# Altium PCB LINDIY.PcbDoc
Units mil, origin at the board's own origin, x right, y up, seen from the top; angles counter-clockwise.
Board outline 1574.8 x 2559.06 mil, 2 copper layers (Top Layer, Bottom Layer); 73 components, 55 nets, 246 pads, 140 vias.
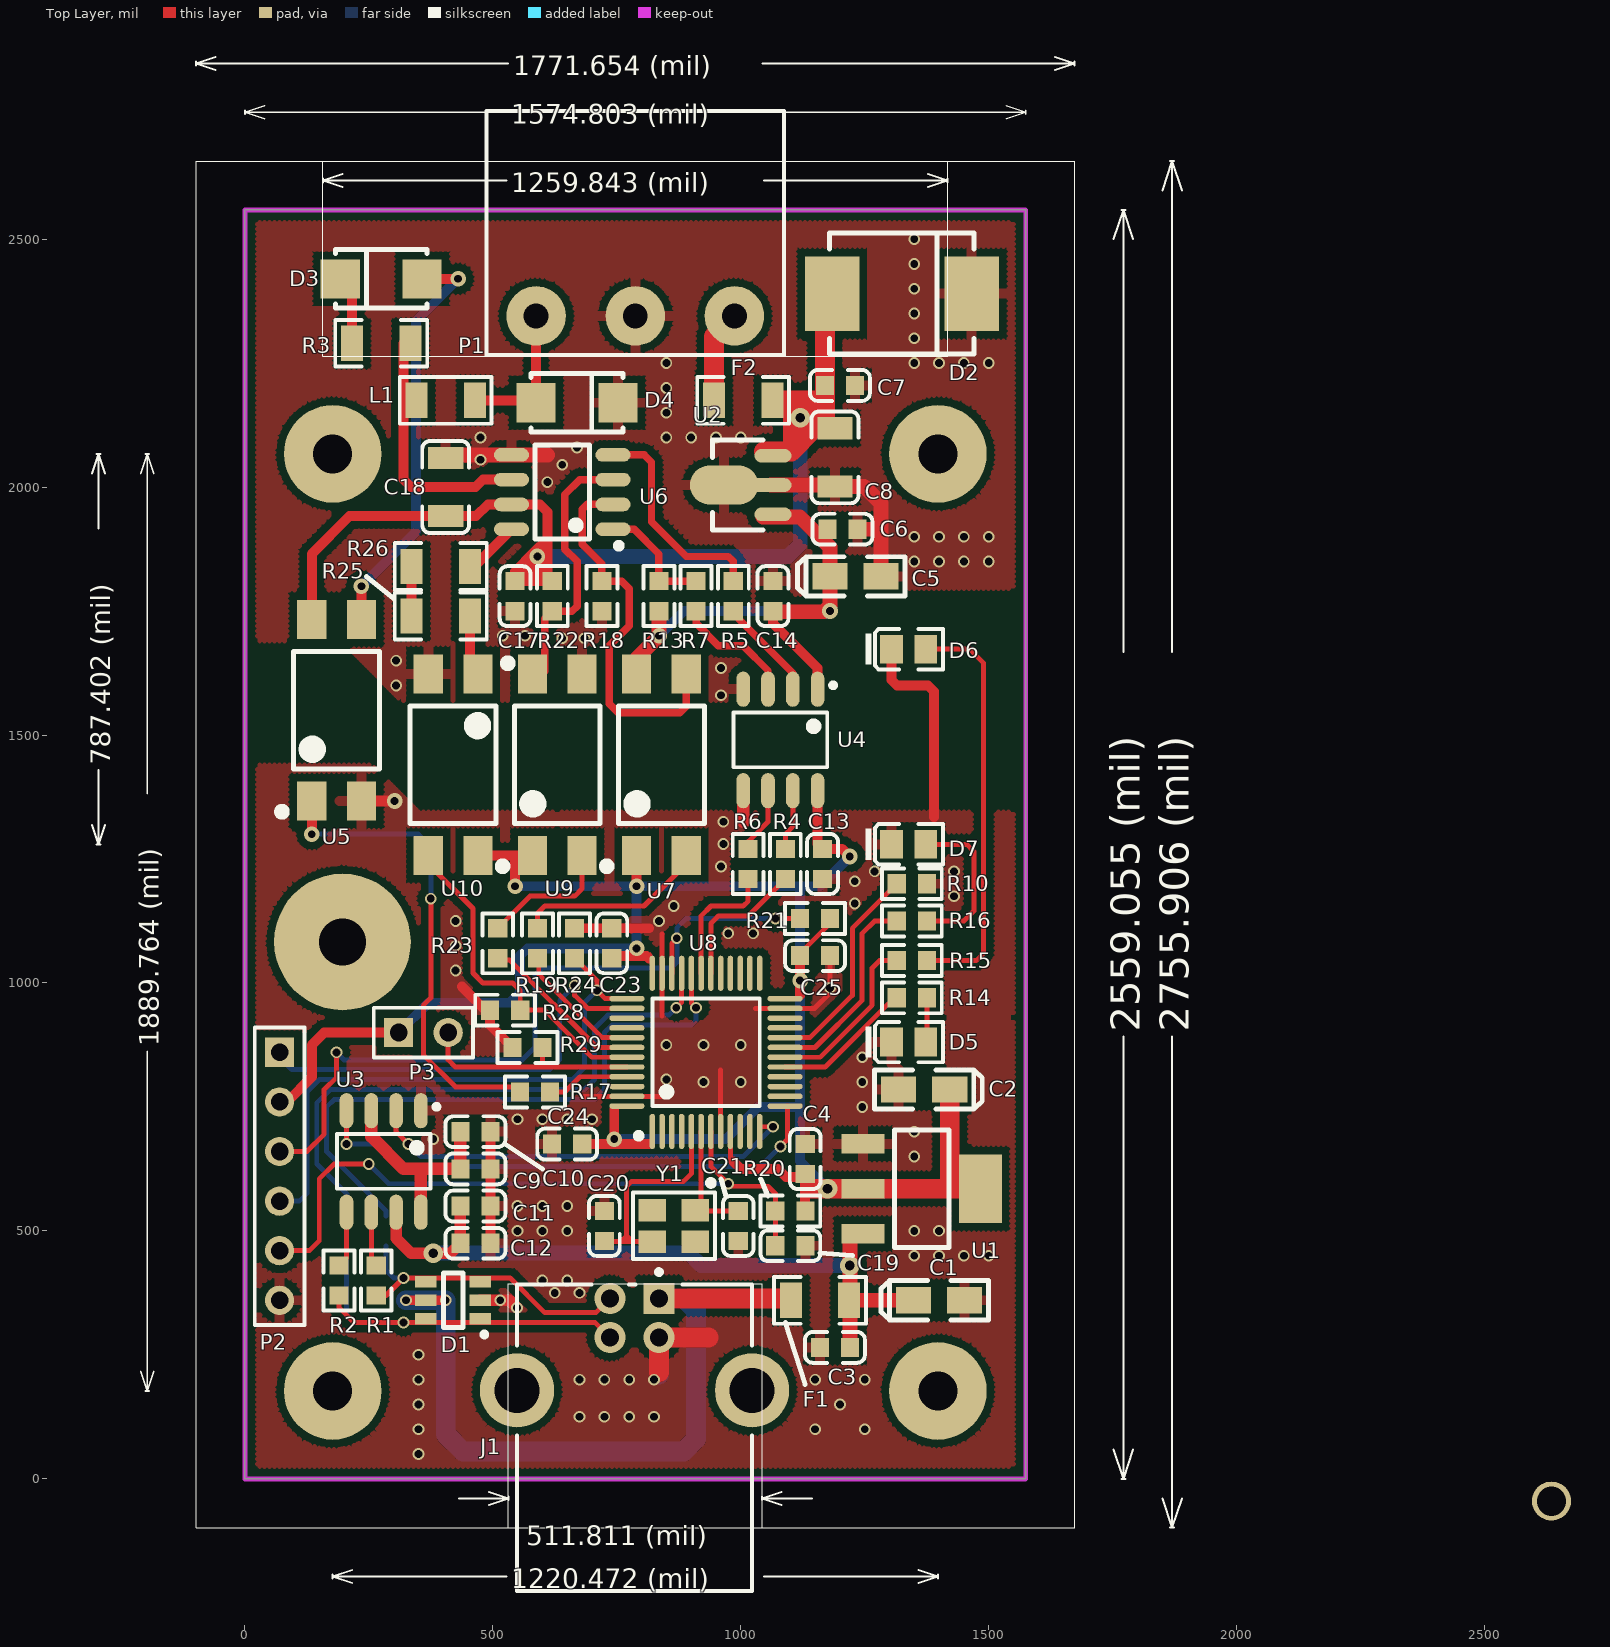
[diagram p0: Top Layer view]
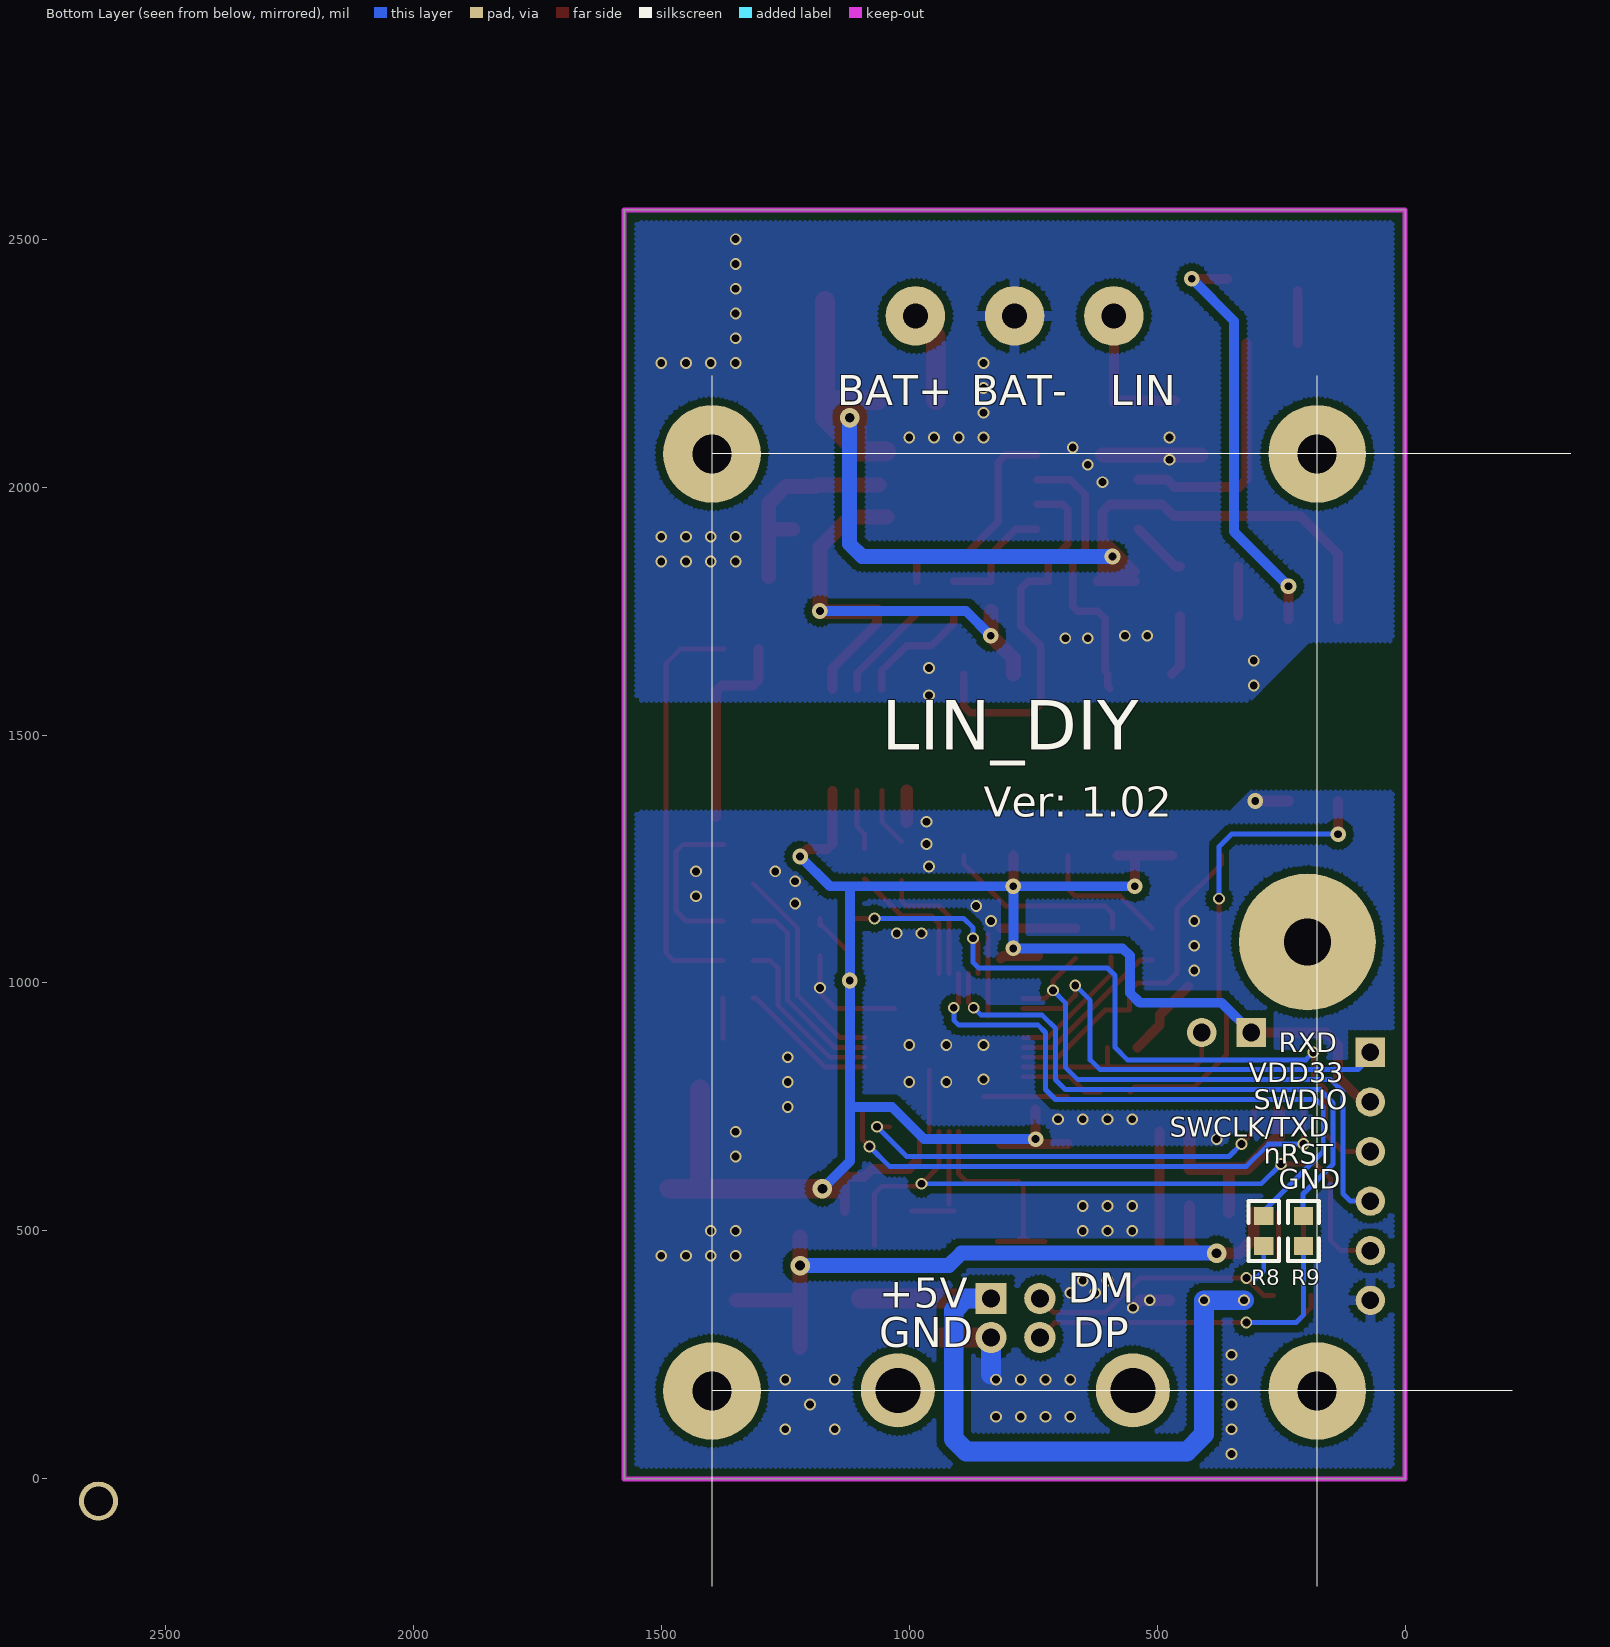
[diagram p1: Bottom Layer view, seen from below]
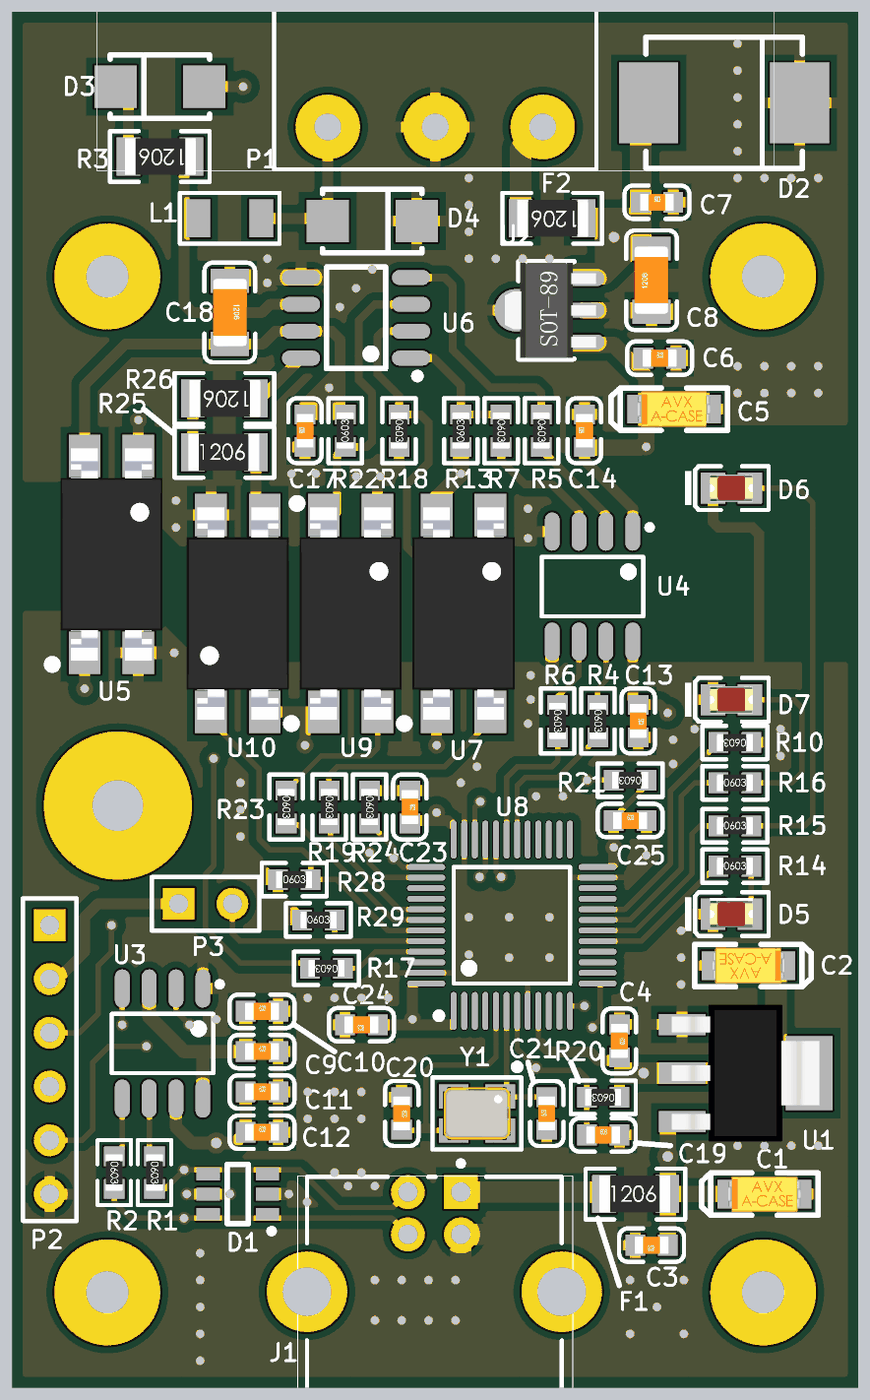
[diagram p2: 3D render of the assembled board from above, using the file's embedded part models]

## Layer stack, top to bottom
Top Layer: signal copper 1.4
Dielectric: dielectric 12.6, FR-4, Dk 4.8
Bottom Layer: signal copper 1.4

## Board outline
0,0 1574.8,0 1574.8,2559.06 0,2559.06

## Design rules (kind name [scope] priority, off if disabled: settings)
Clearance polygon [(InPolygon)] p1: gap=15
Clearance Clearance_1 [All] p2: gap=7.5
ComponentClearance [All] p1: gap=0 collisioncheckmode=3 verticalgap=0 showdistances=FALSE
Height [All] p1: minheight=0 maxheight=10000 prefheight=500
HoleToHoleClearance [All] p1: gap=0 allowstackedmicrovias=TRUE
MinimumSolderMaskSliver [All] p1: minsoldermaskwidth=0
PolygonConnect allPad [(InPadClass('All Pads'))] p1: connectstyle=Relief reliefconductorwidth=20 reliefentries=4 polygonreliefangle="90 Angle"
PolygonConnect [All] p2: connectstyle=Direct reliefconductorwidth=20 reliefentries=4 polygonreliefangle="90 Angle"
RoutingVias [All] p1: holewidth=28 width=50 viastyle="Through Hole" minholewidth=28 minwidth=50 maxholewidth=28 maxwidth=50
SilkToSilkClearance [All] p1: silktosilkclearance=0
SilkscreenOverComponentPads [All] p1: minsilkscreentomaskgap=0
SolderMaskExpansion [All] p1: expansion=4
TestPointUsage [All] p1: valid=0 allowmultiple=FALSE
Testpoint [All] p1: side=15 testpointundercomponent=TRUE minsize=40 maxsize=100 preferedsize=60 minholesize=0 maxholesize=40 preferedholesize=32 testpointgrid=1 style=1023 order=0-112345678
Width [All] p1: maxlimit=200 minlimit=10 preferedwidth=10
18 further rules are at their usual default settings.

## Components (designator, comment, footprint, x,y, rotation, side; value= is the part's Value field where it differs from the comment)
C1 "10uF/16V" LC-CASE-A_3216 1400,360 r180 top
C2 "10uF/16V" LC-CASE-A_3216 1370,785 r0 top
C3 "100nF/50V" LC-0603_C 1190,265 r180 top
C4 "100nF/50V" LC-0603_C 1130,645 r90 top
C5 "10uF/16V" LC-CASE-A_3216 1231.57,1820 r180 top
C6 "100nF/50V" LC-0603_C 1205,1915 r0 top
C7 "100nF/50V" LC-0603_C 1200,2205 r0 top
C8 "10uF/50V" LC-1206_C 1190,2060 r270 top
C9 "4.7uF/16V" LC-0603_C 465,625 r0 top
C10 "100nF/50V" LC-0603_C 465,700 r0 top
C11 "4.7uF/16V" LC-0603_C 465,550 r0 top
C12 "100nF/50V" LC-0603_C 465,475 r0 top
C13 "100nF/50V" LC-0603_C 1165,1240 r90 top
C14 "100nF/50V" LC-0603_C 1065,1780 r270 top
C17 "100nF/50V" LC-0603_C 545,1780 r270 top
C18 "10uF/50V" LC-1206_C 405,2000 r90 top
C19 "100nF" LC-0603_C 1100,470 r0 top
C20 "22pF" LC-0603_C 725,510 r90 top
C21 "22pF" LC-0603_C 995,510 r270 top
C23 "100nF" LC-0603_C 740,1080 r90 top
C24 "100nF" LC-0603_C 650,675 r180 top
C25 "100nF" LC-0603_C 1150,1055 r0 top
D1 "SRV05-4" LC-SOT-23-6 419.88,360 r0 top
D2 "SMCJ28CA" LC-SMC(DO-214AB)_S1 1325,2390 r180 top
D3 "1N4007" LC-SMA(DO-214AC)_S1 275,2420 r0 top
D4 "SMAJ28CA" LC-SMA(DO-214AC)_S1 670,2170 r180 top
D5 "LED_RED" LC-0805_LED_S1 1338.58,880.83 r0 top
D6 "LED_GREEG" LC-0805_LED_S1 1338.58,1673.23 r0 top
D7 "LED_RED" LC-0805_LED_S1 1338.58,1279.53 r0 top
F1 "0.5A/8V" LC-1206_R 1160,360 r0 top
F2 "0.1A/60V" LC-1206_R 1005,2175 r180 top
J1 "USB-B" USB/B 835,363.74 r0 top locked
L1 "600R@100MHz" LC-1206_L 405,2175 r180 top
P1 "LIN PORT" 5.08-3 987.4,2345 r180 top
P2 "SWIO" HDR1X6 70,860 r270 top
P3 "JMP" HDR1X2 310,900 r0 top
R1 "22R" LC-0603_R 265,400 r90 top
R2 "22R" LC-0603_R 190,400 r90 top
R3 "1K" LC-1206_R 275,2290 r180 top
R4 "220R" LC-0603_R 1090,1240 r90 top
R5 "220R" LC-0603_R 985,1780 r90 top
R6 "220R" LC-0603_R 1015,1240 r90 top
R7 "220R" LC-0603_R 910,1780 r90 top
R8 "NC" LC-0603_R 285,500 r90 bottom
R9 "NC" LC-0603_R 205,500 r90 bottom
R10 "10K" LC-0603_R 1345,1200 r180 top
R13 "4K7" LC-0603_R 835,1780 r270 top
R14 "330R" LC-0603_R 1345,970 r0 top
R15 "330R" LC-0603_R 1345,1045 r0 top
R16 "330R" LC-0603_R 1345,1125 r0 top
R17 "330R" LC-0603_R 585,780 r180 top
R18 "2K" LC-0603_R 720,1780 r90 top
R19 "330R" LC-0603_R 590,1080 r90 top
R20 "10K" LC-0603_R 1100,540 r180 top
R21 "10K" LC-0603_R 1150,1130 r180 top
R22 "10K" LC-0603_R 620,1780 r270 top
R23 "330R" LC-0603_R 510,1080 r90 top
R24 "10K" LC-0603_R 665,1080 r90 top
R25 "1K" LC-1206_R 395,1740 r0 top
R26 "1K" LC-1206_R 395,1840 r180 top
R28 "1K" LC-0603_R 525,945 r0 top
R29 "10K" LC-0603_R 570,870 r0 top
U1 "AMS1117-3.3" LC-SOT-223 1365,585 r180 top
U2 "78L05" LC-SOT-89(SOT-89-3) 1065,2004.06 r0 top
U3 "PL2303SA" LC-SO-8_3.9mm 280,640 r180 top
U4 "ADUM1201" LC-SO-8_3.9mm 1080,1490 r180 top
U5 "EL817S1" LC-SMD-4 185,1550 r90 top
U6 "TJA1020T" LC-SOIC-8_150mil 640,1990 r90 top
U7 "EL817S1" LC-SMD-4 840,1440 r90 top
U8 "STM32F072C8T6" LC-LQFP-48_7x7x05P 930,860 r0 top locked
U9 "EL817S1" LC-SMD-4 630,1440 r90 top
U10 "EL817S1" LC-SMD-4 420,1440 r270 top
Y1 "8MHz" LC-SMD-3225_4P 865,510 r180 top

## Footprints (in the part's own frame and the unit in brackets; to place one, negate y for a bottom-side part, rotate by r counter-clockwise, add the part's x,y. Pads: shape width x height; smd on the part's side, far side on the other; paste and mask are expansions set on the pad)
5.08-3 [mil]
  round 120 hole 50: 1(0,0) 2(200,0) 3(400,0)
  silkscreen extent -100,-413 500,79
HDR1X2 [mm] "Connector; Header; 2 Position"
  rect 1.5x1.5 hole 0.9: 1(0,0)
  round 1.5 hole 0.9: 2(2.54,0)
  silkscreen extent -1.27,-1.27 3.81,1.27
HDR1X6 [mm] "Connector; Header; 6 Position"
  rect 1.5x1.5 hole 0.9: 1(0,0)
  round 1.5 hole 0.9: 2(2.54,0) 3(5.08,0) 4(7.62,0) 5(10.16,0) 6(12.7,0)
  silkscreen extent -1.27,-1.27 13.97,1.27
LC-0603_C [mm]
  rect 0.93x0.98 smd: 1(-0.77,0) 2(0.77,0)
  silkscreen extent -1.53,-0.79 1.54,0.79, body extent -0.8,-0.4 0.8,0.4, height 0.3
LC-0603_R [mm]
  rect 0.93x0.98 smd: 1(-0.77,0) 2(0.77,0)
  silkscreen extent -1.53,-0.79 1.54,0.79, body extent -0.85,-0.4 0.85,0.4, height 0.56
LC-0805_LED_S1 [mm]
  rect 1.16x1.47 smd: A(0.875,0) K(-0.875,0)
  silkscreen extent -2.2,-1.04 1.76,1.03, body extent -1.01,-0.62 1.01,0.62, height 1.1
LC-1206_C [mm]
  rect 1.13x1.8 smd: 1(-1.49,0) 2(1.49,0)
  silkscreen extent -2.36,-1.2 2.35,1.2, body extent -1.6,-0.81 1.6,0.79, height 1
LC-1206_L [mm]
  rect 1.13x1.8 smd: 1(-1.49,0) 2(1.49,0)
  silkscreen extent -2.36,-1.2 2.35,1.2
LC-1206_R [mm]
  rect 1.13x1.8 smd: 1(-1.49,0) 2(1.49,0)
  silkscreen extent -2.36,-1.2 2.35,1.2, body extent -1.7,-0.86 1.65,0.87, height 0.85
LC-CASE-A_3216 [mm]
  rect 1.8x1.35 smd: 1(1.31,0) 2(-1.31,0)
  silkscreen extent -2.54,-1 2.97,1, body extent -1.7,-0.84 1.7,0.84, height 1.71
LC-LQFP-48_7x7x05P [mm]
  oval 0.28x1.8 smd mask+0.051: 1(-2.75,-4.05) 2(-2.25,-4.05) 3(-1.75,-4.05) 4(-1.25,-4.05) 5(-0.75,-4.05) 6(-0.25,-4.05) 7(0.25,-4.05) 8(0.75,-4.05) 9(1.25,-4.05) 10(1.75,-4.05) 11(2.25,-4.05) 12(2.75,-4.05) 25(2.75,4.05) 26(2.25,4.05) 27(1.75,4.05) 28(1.25,4.05) 29(0.75,4.05) 30(0.25,4.05) 31(-0.25,4.05) 32(-0.75,4.05) 33(-1.25,4.05) 34(-1.75,4.05) 35(-2.25,4.05) 36(-2.75,4.05)
  oval 1.8x0.28 smd mask+0.051: 13(4.05,-2.75) 14(4.05,-2.25) 15(4.05,-1.75) 16(4.05,-1.25) 17(4.05,-0.75) 18(4.05,-0.25) 19(4.05,0.25) 20(4.05,0.75) 21(4.05,1.25) 22(4.05,1.75) 23(4.05,2.25) 24(4.05,2.75) 37(-4.05,2.75) 38(-4.05,2.25) 39(-4.05,1.75) 40(-4.05,1.25) 41(-4.05,0.75) 42(-4.05,0.25) 43(-4.05,-0.25) 44(-4.05,-0.75) 45(-4.05,-1.25) 46(-4.05,-1.75) 47(-4.05,-2.25) 48(-4.05,-2.75)
  silkscreen extent -3.6,-4.42 2.75,2.75
LC-SMA(DO-214AC)_S1 [mm]
  rect 2x2 smd: 1(2.1,0) 2(-2.1,0)
  silkscreen extent -2.35,-1.5 2.35,1.5
LC-SMC(DO-214AB)_S1 [mil]
  rect 110x150 smd: 1(140.49,0) 2(-140.49,0)
  silkscreen extent -146,-122 146,122
LC-SMD-4 [mm]
  rect 2x1.5 smd: 1(-4.65,1.27) 2(-4.65,-1.27) 3(4.65,-1.27) 4(4.65,1.27)
  silkscreen extent -5.4,-2.2 3,3, body extent -5.02,-2.42 5.01,2.42, height 3.9
LC-SMD-3225_4P [mm]
  rect 1.4x1.15 smd: 1(-1.1,-0.8) 2(1.1,-0.8) 3(1.1,0.8) 4(-1.1,0.8)
  silkscreen extent -2.1,-2.35 2.1,1.7, body extent -1.6,-1.25 1.6,1.25, height 0.61
LC-SO-8_3.9mm [mm]
  oval 0.7x1.8 smd: 1(-1.905,-2.6) 2(-0.635,-2.6) 3(0.635,-2.6) 4(1.905,-2.6) 5(1.905,2.6) 6(0.635,2.6) 7(-0.635,2.6) 8(-1.905,2.6)
  silkscreen extent -2.83,-2.92 2.4,1.4
LC-SOIC-8_150mil [mm]
  oval 0.7x1.8 smd: 1(-1.905,-2.6) 2(-0.635,-2.6) 3(0.635,-2.6) 4(1.905,-2.6) 5(1.905,2.6) 6(0.635,2.6) 7(-0.635,2.6) 8(-1.905,2.6)
  silkscreen extent -2.9,-3.05 2.4,1.4
LC-SOT-23-6 [mm]
  rect 1.1x0.6 smd: 1(1.4,-0.95) 2(1.4,0) 3(1.4,0.95) 4(-1.4,0.95) 5(-1.4,0) 6(-1.4,-0.95)
  silkscreen extent -0.5,-1.87 1.73,1.4
LC-SOT-89(SOT-89-3) [mm]
  oval 1.9x0.7 smd: 1(0,-1.5) 3(0,1.5)
  oval 3.5x2 smd: 2(-2.5,0)
  oval 2.1x0.7 smd: 2(-0.1,0)
  silkscreen extent -3.1,-2.3 -0.5,2.3, body extent -3.75,-2.25 0.55,2.25, height 1.51
LC-SOT-223 [mm]
  rect 2.2x1 smd: 1(3,-2.3) 2(3,0) 3(3,2.3)
  rect 2.2x3.5 smd: 2(-3,0)
  silkscreen extent -1.4,-3 1.4,3, body extent -3.49,-3.24 3.49,3.24, height 1.64
USB/B [mm]
  rect 1.6x1.6 hole 0.92: 1(0,0)
  round 1.6 hole 0.92: 2(-2.5,0) 3(-2.5,-2) 4(0,-2)
  round 3.8 hole 2.3: 5(4.77,-4.71) 6(-7.27,-4.71)
  silkscreen extent -7.27,-14.99 4.77,1.47

## Part data
C1 C2 C5: library part "Cap Pol2", "Polarized Capacitor (Axial)"
C3 C4 C6 C7 C8 C9 C10 C11 C12 C13 C14 C17 C18 C19 C20 C21 C23 C24 C25: library part Cap, "Capacitor"
D1: "Low Capacitance TVS Diode Array"
D2 D4: library part P6KE6.8CA, "Zener Diode"
D3: library part "Diode BAS116", "Silicon Low Leakage Diode"
D5: library part LED-R
D6: library part LED-G
D7: library part LED-B
F1 F2: library part "Fuse Thermal", "Thermal Fuse"
J1: library part MINI-USB
L1: library part FerriteBeads
P1: library part "Header 3", "Header, 3-Pin"
P2: library part "Header 6", "Header, 6-Pin"
P3: library part "Header 2", "Header, 2-Pin"
R1 R2 R3 R4 R5 R6 R7 R8 R9 R10 R13 R14 R15 R16 R17 R18 R19 R20 R21 R22 R23 R24 R25 R26 R28 R29: library part Res2, "Resistor"
U1: library part AMS1117
U2: library part MC7805ACT, "Three-Terminal Positive Voltage Regulator"
U3: "USB to Serial Bridge Controller (SOP8 Package)"
U4: "Dual-Channel Digital Isolators"
U5 U7 U9 U10: library part TLP521-1
U6: library part TJA1020, "LIN transceiver"
U8: library part STM32F103C8T6, "STM32 ARM-based 32-bit MCU with 64 Kbytes Flash, 48-pin LQFP, Industrial Temperature"
Y1: library part XTAL, "Crystal Oscillator"

## Free pads (board coordinates)
  round 196.85 hole 78.74: 0(177.17,177.17) 0(177.17,2066.93) 0(1397.64,177.17) 0(1397.64,2066.93)
  round 275.59 hole 94.49: 0(196.85,1082.68)
  round 78.74 hole 59.06: 0(2635,-45)
  rect 80x50 on Top Overlay: 1(1338.58,1279.53) 2(1338.58,1673.23) 3(1338.58,885.83)

## Via types
v1: diameter 23.62, hole 15.75, Top Layer to Bottom Layer, tented both sides, 123 vias
v2: diameter 31.5, hole 15.75, Top Layer to Bottom Layer, tented both sides, 13 vias
v3: diameter 39.37, hole 19.68, Top Layer to Bottom Layer, tented both sides, 4 vias

## Nets (pads, with @x,y where several pads share a name; then routed paths per layer and width w, separated by ;. In a path a pad name is that pad's centre, name@x,y a point inside that pad or via, vN(x,y) a via of type N, cw(c..) or ccw(c..) an arc to the next point about the centre after c; other vN are vias at no path point)
BOOT0: P3.2 R29.2 U8.44 | length 456.4
  Top Layer w10: P3.2 410,845 424.53,830.47 U8.44 ; 600.32,835.16 R29.2
BOOT1: R10.2 U8.20 | length 433.1
  Top Layer w10: U8.20 1139.53,889.53 1225,975 1225,1110.32 R10.2
DGND: C1.2 C2.2 C3.2 C4.2 C9.2 C10.2 C11.2 C12.2 C13.1 C19.2 C20.2 C21.2 C23.2 C24.2 C25.2 D1.2 D5.K D6.K D7.K J1.4 P2.6 R10.1 R24.2 R28.1 R29.1 U1.1 U3.1 U4.5 U5.2 U8.8 U8.23 U8.35 U8.47 | length 2100.9
  Top Layer w10: 681.42,771.42 U8.47 850,771.42 ; 841.42,933.58 U8.35 841.42,1098.58 ; U8.8 959.53,824.53 ; 1030,948.58 U8.23 1148.58,948.58 1180.32,980.32 C25.2
  Top Layer w20: 437.5,992.5 494.69,935.31 494.69,915 R29.1 ; C12.2 C10.2 ; R24.2 815.32,1110.32 ; D6.K 1304.13,1610.87 1315,1600 1377.64,1600 1390,1587.64 1390,1335
  Top Layer w23: U5.2 v2(301.93,1366.93) ; D1.2 v1(515,360) 533.78,360 v1(548.78,345)
  Top Layer w25: 1005,1325 U4.5
  Top Layer w40: 835,215 J1.4 935,285
  Bottom Layer w40: 835,210 J1.4
  other v1: 350,50 350,100 1150,100 1250,100 675,125 725,125 775,125 825,125 350,150 1200,150 350,200 675,200 725,200 775,200 825,200 1150,200 1250,200 350,250 625,375 675,375 600,400 650,400 1350,450 1400,450 1450,450 1500,450 550,500 600,500 650,500 1350,500 1400,500 550,550 600,550 650,550 1350,650 380,685 1350,700 550,725 600,725 650,725 700,725 1245,750 925,800 1000,800 1245,800 850,805.47 1245,850 850,875 925,875 1000,875 1180,990 425,1025 425,1075 975,1100 1025,1100 425,1125 835,1125 865,1155 1230,1160 1430,1175 1230,1205 1270,1225 1430,1225 960,1235 965,1280 965,1325
DM: D1.3 D1.4 J1.2 R1.1 R8.1 | length 618
  Top Layer w10: R1.1 284.69,369.69 v1(320,405) 364.76,405 475,405 535,405 605,335 707.83,335 J1.2
  Bottom Layer w10: R8.1 285,420 300,405 v1(320,405)
DP: D1.1 D1.6 J1.3 R2.1 R9.1 | length 857
  Top Layer w10: R2.1 190,345 220,315 v1(320,315) 364.76,315 475,315 706.57,315 J1.3
  Bottom Layer w10: R9.1 205,330 220,315 v1(320,315)
L5V: C5.1 C6.1 C14.2 R13.2 U2.1 U4.1 U7.4 | length 1102.7
  Top Layer w20: C14.2@1065,1748.5 1065,1725 1155,1635 U4.1
  Top Layer w30: U7.4 790,1654.6 v2(835.4,1700) ; v2@835,1700.4 R13.2 ; U2.1@1045,1940 1065,1940 1118.9,1940 1159.29,1899.61 1180,1878.9 C5.1 1180,1760 1175,1755 1168.5,1748.5 C14.2@1065,1748.5
  Bottom Layer w20: v2(835.4,1700) 885.4,1750 v2(1180,1750)
LED1: R14.1 U8.17 | length 283.1
  Top Layer w10: U8.17 1170.47,830.47 1309.84,969.84 1314.69,969.84 R14.1@1314.84,969.84
LED2: R15.1 U8.18 | length 349.9
  Top Layer w10: U8.18 1160.16,850.16 1265,955 1265,1030 1280,1045 R15.1
LED3: R16.1 U8.19 | length 410
  Top Layer w10: U8.19 1149.84,869.84 1245,965 1245,1100 1270,1125 R16.1
LGND: C5.2 C6.2 C7.2 C8.2 C14.1 C17.2 C18.2 D2.2 D4.2 P1.2 R18.1 U2.2 U4.4 U6.5 U9.3 U10.2 | length 622
  Top Layer w30: C18.2@411.34,2065 610,2065 ; U2.2@1061.06,2004.06 C8.2@1187.28,2004.06 ; C8.2 1248.66,2001.34 1283.15,1966.85 C5.2 ; C6.2 1278.15,1915
  other v1: 960,1580 305,1600 960,1635 305,1650 640,1695 685,1695 520,1700 565,1700 1350,1850 1400,1850 1450,1850 1500,1850 1350,1900 1400,1900 1450,1900 1500,1900 610,2010 640,2045 475,2055 670,2080 475,2100 850,2100 900,2100 950,2100 1000,2100 850,2150 850,2200 850,2250 1350,2250 1400,2250 1450,2250 1500,2250 1350,2300 1350,2350 1350,2400 1350,2450 1350,2500
LIN_INH: R26.1 U6.8 | length 115
  Top Layer w20: R26.1 462.64,1840 U6.8
LIN_NSLP: R18.2 U6.2 U7.3 | length 770.3
  Top Layer w15: U6.2 690,1965 680,1955 680,1885 720,1845 R18.2 759.68,1810.32 775,1795 775,1720 735,1680 735,1563.39 753.39,1545 876.89,1545 890,1558.11 U7.3
LIN_NWAKE: R22.2 U6.3 U9.4 | length 566.6
  Top Layer w15: U9.4@595,1593.07 600,1598.07 600,1623.07 605,1628.07 605,1735 619.68,1749.68 R22.2 659.68,1749.68 670,1760 670,1850 645,1875 645,1985 675,2015 U6.3
LIN_OUT: L1.2 R3.1 U6.6 | length 505.1
  Top Layer w20: R3.1@320,2290 320,2175 320,2015 335,2000 465,2000 480,2015 U6.6
LIN_PULLUP: D3.1 U5.3 | length 840
  Top Layer w20: U5.3 v2(235,1800) ; D3.1 v2(430,2420)
  Bottom Layer w20: v2(235,1800) 345,1910 345,2335 v2(430,2420)
LIN_RX: R7.2 R13.1 U6.1 | length 243
  Top Layer w15: U6.1 785,1915 835,1865 R13.1 R7.2
LIN_TX: R5.2 U6.4 | length 441.7
  Top Layer w15: U6.4 805,2065 820,2050 820,1930 890,1860 975,1860 985,1850 R5.2
MCU_3V3: C2.1 C4.1 C13.2 C23.1 C24.1 C25.1 P2.2 P3.1 R20.1 R21.1 U1.2 U4.8 U7.1 U8.1 U8.9 U8.24 U8.36 U8.48 U9.1 U10.4 | length 4474.7
  Top Layer w10: U8.9 979.21,645.79 985,640 ; C25.1@1119.68,1060 R21.1@1180.31,1120.63 ; R21.1@1180.31,1115.63 R21.1@1180.31,1120.63 ; R21.1 R21.1@1180.31,1120.63
  Top Layer w20: P2.2@85,760 135,810 135,875 160,900 P3.1 ; U10.4 545,1256.93 ; v2(545,1195) 545,1256.93 ; U9.1 545,1256.93 ; C24.1 v2@745,675 ; C23.1@740,1054.68 790,1054.68 810.32,1054.68 815.32,1049.68 ; 745,745 v2(745,685) v2@745,675 ; v2(790,1195) U7.1 ; 815,675 v2@745,675 ; 985,640 1000.32,624.68 1075.32,624.68 1091.49,608.51 C4.1@1130,608.51 ; 1119.68,975 v2(1119.68,1005) C25.1 ; R20.1@1130,540.31 C4.1 ; C13.2@1155,1280.32 U4.8 ; C13.2 1204.68,1270.32 v2(1220,1255)
  Top Layer w40: 1140,585 v3(1175,585) 1246.89,585 U1.2@1483.11,585 ; 1421.57,588.43 C2.1
  Bottom Layer w20: P3.1 370,960 535,960 555,980 555,1055 569.68,1069.68 v2(790,1069.68) v2(790,1195) ; v2(545,1195) v2(790,1195) ; v2(745,685) 970,685 1035,750 1119.68,750 ; v3(1175,585) 1119.68,640.32 1119.68,750 ; v2(1220,1255) 1160,1195 1119.68,1195 ; v2(790,1195) 1119.68,1195 ; 1119.68,750 v2(1119.68,1005) 1119.68,1195
MCU_INH: R28.2 U8.43 U10.3 | length 673.4
  Top Layer w10: U10.3 370,1240 460,1150 460,1020 480,1000 540,1000 555.32,984.68 R28.2 ; R28.2@560.32,945 605,945 699.84,850.16 U8.43
MCU_MST: R17.1 U8.45 | length 168
  Top Layer w10: R17.1 645,780 675.79,810.79 U8.45
MCU_NSLP: R19.1 U8.41 | length 265.8
  Top Layer w10: R19.1@592.66,1052.34 592.66,1049.69 592.66,1017.34 720.47,889.53 U8.41
MCU_NWAKE: R23.1 U8.42 | length 333.7
  Top Layer w10: R23.1@510,1046.54 533.46,1046.54 710.16,869.84 U8.42
NetD3_2: D3.2 R3.2 | length 106
  Top Layer w20: R3.2 D3.2@216.34,2395.98
NetD4_1: D4.1 L1.1 P1.3 | length 293.6
  Top Layer w20: L1.1 D4.1@582.32,2175 ; D4.1 P1.3@587.32,2344.92
NetD5_A: D5.A R14.2 | length 81.9
  Top Layer w10: D5.A@1375.32,888.11 R14.2
NetD6_A: D6.A R15.2 | length 834.6
  Top Layer w10: D6.A 1461.77,1673.23 1490,1645 1490,1060 1475,1045 R15.2
NetD7_A: D7.A R16.2 | length 326
  Top Layer w10: D7.A 1455.47,1279.53 1470,1265 1470,1145 1450,1125 R16.2
NetR4_2: R4.2 U4.7 | length 123.5
  Top Layer w10: R4.2 1090,1300 1105,1315 U4.7
NetR5_1: R5.1 U4.2 | length 207
  Top Layer w15: R5.1 985,1745 1105,1625 U4.2
NetR6_2: R6.2 U4.6 | length 119.2
  Top Layer w10: R6.2@1015,1285 1055,1325 U4.6
NetR7_1: R7.1 U4.3 | length 246.7
  Top Layer w15: R7.1 910,1725 955,1680 1005,1680 1055,1630 U4.3
NetR8_2: R8.2 U8.32 | length 1252.6
  Top Layer w10: U8.32 900.47,959.53 v1(910,950)
  Bottom Layer w10: R8.2 285,540 165,660 165,750 180,765 705,765 725,785 725,900 740,915 900,915 910,925 v1(910,950)
NetR9_2: R9.2 U8.33 | length 1198.5
  Top Layer w10: v1(870,950) 880.79,960.79 U8.33
  Bottom Layer w10: R9.2@210.86,525.86 205.7,531.02 205.7,574.3 145,635 145,758.28 171.72,785 685,785 705,805 705,908.28 731.72,935 855,935 v1(870,950)
NetR17_2: R17.2 U5.1 | length 969.2
  Top Layer w10: v1(375,1170) 375,970 360,955 360,855 425,790 544.68,790 R17.2
  Top Layer w20: v2(135,1300) U5.1
  Bottom Layer w10: v2(135,1300) 350,1300 375,1275 v1(375,1170)
NetR19_2: R19.2 U7.2 | length 388
  Top Layer w10: R19.2 590,1140 605,1155 805,1155 890,1240 U7.2
NetR23_2: R23.2 U9.2 | length 269.6
  Top Layer w10: R23.2@510.32,1110.32 575,1175 665,1175 680,1190 U9.2
NetR25_1: R25.1 R26.2 | length 100
  Top Layer w20: R25.1 R26.2
NetR25_2: R25.2 U10.1 | length 123.7
  Top Layer w20: R25.2 453.66,1639.41 U10.1
NRST: C19.1 P2.5 R20.2 U8.7 | length 1395.5
  Top Layer w10: P2.5 130,460 150,480 150,605 180,635 v1(250,635) ; U8.7 939.84,630.16 v1(975,595) 980,590 1055,590 1069.68,575.32 R20.2 C19.1
  Bottom Layer w10: v1(250,635) 290,595 v1(975,595)
OSC8M_IN: C20.1 U8.5 Y1.3 | length 470.6
  Top Layer w10: C20.1@726.18,478.5 758.5,478.5 ; 776.5,478.5 781.5,478.5 ; Y1.3 781.5,478.5 ; U8.5 900.47,615.47 885,600 780,600 770,590 770,490 ; 758.5,478.5 770,478.5 ; 758.5,478.5 770,490 ; 770,478.5 770,490 ; 770,478.5 781.5,478.5 ; 770,490 781.5,478.5
OSC8M_OUT: C21.1 U8.6 Y1.1 | length 232.7
  Top Layer w10: Y1.1@909.49,540.32 C21.1 ; Y1.1@920.16,553.35 U8.6
PA15: P2.1 U8.38 | length 882.6
  Top Layer w10: v1(665,995) 665,975 691.42,948.58 U8.38
  Bottom Layer w10: P2.1@70,850 95,825 615,825 635,845 635,965 v1(665,995)
SWCLK: P2.4 R24.1 U8.37 | length 1163.1
  Top Layer w10: R24.1 710,1004.69 v1(710,985) 726.73,968.27 U8.37
  Bottom Layer w10: P2.4 110,560 125,575 125,780 150,805 660,805 685,830 685,960 v1(710,985)
SWDIO: P2.3 R21.2 U8.34 | length 1539.4
  Top Layer w10: P2.3 125,660 160,695 160,785 185,810 v1(185,860) ; U8.34 861.1,1080 v1(871.1,1090) ; v1(1070,1130) R21.2
  Bottom Layer w10: v1(185,860) 200,845 560,845 585,870 585,1015 600,1030 860,1030 871.1,1041.1 v1(871.1,1090) 871.1,1111.1 890,1130 v1(1070,1130)
USART1_RXD: R6.1 U8.31 | length 264.5
  Top Layer w10: U8.31 920.16,1135.16 940,1155 1005,1155 1015,1165 R6.1@1015,1206.54
USART1_TXD: R4.1 U8.30 | length 287.8
  Top Layer w10: U8.30 939.84,1119.84 955,1135 1015.31,1135 R4.1
USART2_RXD: U3.4 U8.13 | length 1065.3
  Top Layer w10: v1(205,675) U3.4 ; v1(1080,670) 1094.45,684.45 U8.13@1094.45,751.73
  Bottom Layer w10: v1(205,675) 275,675 320,630 1040,630 v1(1080,670)
USART2_TXD: U3.2 U8.12 | length 872.9
  Top Layer w10: U3.2 305,700 v1(330,675) ; U8.12@1040,710 v1(1065,710)
  Bottom Layer w10: v1(330,675) 355,650 1005,650 v1(1065,710)
USB_3V3: C9.1 C10.1 U3.3 U3.8 | length 421.3
  Top Layer w25: U3.3 255,690 320,625 355,625 ; U3.8 355,625 ; C10.1 C9.1 355,625
USB_5V: C1.1 C3.1 C11.1 C12.1 F1.2 U1.3 U3.7 | length 1479.4
  Top Layer w23: U3.7 305,485 335,455 v3(380,455) 414.68,455 C12.1 C11.1
  Top Layer w30: C3.1 F1.2@1220.32,360 ; U1.3@1220.32,487.87 1220.32,430 F1.2@1220.32,360 ; C1.1 F1.2@1220.32,360
  Bottom Layer w30: v3(380,455) 895,455 920,430 v3(1220,430)
USB_DM: R1.2 U3.6 | length 97.3
  Top Layer w10: R1.2@255,440.32 U3.6
USB_DP: R2.2 U3.5 | length 92.3
  Top Layer w10: R2.2@205,445.32 U3.5
USB_VIN: D1.5 F1.1 J1.1 | length 1567.6
  Top Layer w20: v1(325,360) D1.5 v1(405.2,360)
  Top Layer w40: J1.1 F1.1@1097.6,363.74
  Bottom Layer w40: v1(325,360) v1(405.2,360) 405.2,89.8 440,55 885,55 910,80 910,340 886.26,363.74 J1.1
VBAT: C7.1 C8.1 C17.1 C18.1 D2.1 F2.1 R22.1 U2.3 U5.4 U6.7 | length 2245.8
  Top Layer w20: U5.4 135,1865 211.34,1941.34 C18.1 466.34,1941.34 490,1965 U6.7 595,1965 610,1950 610,1895 ; C17.1 R22.1 ; 545,1830 582.5,1867.5 610,1895 ; R22.1@610,1813.46 610,1860 610,1895
  Top Layer w40: U2.3@1046.89,2071.93 1065,2071.93 1101.93,2071.93 1145,2115 1169.33,2139.33 1169.68,2139.68 1169.68,2175 ; F2.1 1120,2175 1169.68,2175 ; D2.1@1169.68,2375.18 C7.1 1169.68,2175
  Bottom Layer w30: v2(590,1860) 1095,1860 1120,1885 v3(1120,2140)
VBAT_IN: F2.2 P1.1 | length 187
  Top Layer w40: F2.2 946.34,2303.94 P1.1
pads on no net: J1.5 J1.6 U8.2 U8.3 U8.4 U8.10 U8.11 U8.14 U8.15 U8.16 U8.21 U8.22 U8.25 U8.26 U8.27 U8.28 U8.29 U8.39 U8.40 U8.46 Y1.2 Y1.4

## Polygon pours and split planes (outlines as drawn)
LGND on Top Layer "Top Layer-No Net" (hatched 90Degree grid 10 track 10, remove dead copper, pour order 1001): 310,2559.06 0,2559.06 0,1690 195,1690 300,1585 315,1570 1335,1570 1574.8,1570 1574.8,2559.06
DGND on Top Layer "Top Layer-No Net" (hatched 90Degree grid 10 track 10, remove dead copper, pour order 1000): 0,1440 255,1440 350,1345 1574.8,1345 1574.8,0 0,0
LGND on Bottom Layer "Top Layer-No Net" (hatched 90Degree grid 10 track 10, remove dead copper, pour order 1002): 310,2559.06 0,2559.06 0,1690 195,1690 300,1585 315,1570 1335,1570 1574.8,1570 1574.8,2559.06
DGND on Bottom Layer "Top Layer-No Net" (hatched 90Degree grid 10 track 10, remove dead copper, pour order 1003): 0,1385 310,1385 350,1345 1574.8,1345 1574.8,0 0,0

## Keep-outs
Keep-Out Layer:
  the board outline again, w10

## Other copper
Top Layer:
  rectangle net MCU_3V3: 1130,575 1145,614.68
  rectangle net VBAT: 580,1810.31 610,1870
  rectangle net VBAT: 545,1810.31 575,1840
  rectangle net VBAT: 565,1810.31 585,1855.43
  rectangle net VBAT: 1085,2085 1125,2175
  rectangle net VBAT: 1110,2110 1170,2175
  pour cut-out: 1615,1795 1180,1795 1180,1535 1210,1505 1673.23,1505

## Silkscreen, mask and mechanical layers (free items; w line width, h text height)
Top Overlay:
  lines w1: -98.43,-98.43 1673.23,-98.43 1673.23,2657.48 -98.43,2657.48 -98.43,-98.43 ; 157.48,2263.78 157.48,2559.06 157.48,2657.48 1417.32,2657.48 1417.32,2263.78 157.48,2263.78 ; 531.5,-98.43 1043.31,-98.43 1043.31,393.7 531.5,393.7 531.5,0 531.5,-98.43
  lines w3.94: -308.4,1318.9 -295.28,1279.53 ; -308.4,2027.56 -295.28,2066.93 ; -299.21,1279.53 -291.34,1279.53 ; -299.21,2066.93 -291.34,2066.93 ; -295.28,1429.71 -295.28,1279.53 ; -295.28,1916.75 -295.28,2066.93 ; -282.15,1318.9 -295.28,1279.53 ; -282.15,2027.56 -295.28,2066.93 ; -209.97,216.54 -196.85,177.17 ; -209.97,2027.56 -196.85,2066.93 ; -200.79,177.17 -192.91,177.17 ; -200.79,2066.93 -192.91,2066.93 ; -196.85,862.13 -196.85,177.17 ; -196.85,1381.97 -196.85,2066.93 ; -183.73,216.54 -196.85,177.17 ; -183.73,2027.56 -196.85,2066.93 ; -98.43,2850.39 -98.43,2858.27 ; -59.06,2841.21 -98.43,2854.33 ; -59.06,2867.45 -98.43,2854.33 ; 0,2751.97 0,2759.84 ; 39.37,2742.78 0,2755.91 ; 39.37,2769.03 0,2755.91 ; 157.48,2614.17 157.48,2622.05 ; 177.17,-200.79 177.17,-192.91 ; 196.85,2604.99 157.48,2618.11 ; 196.85,2631.23 157.48,2618.11 ; 216.54,-209.97 177.17,-196.85 ; 216.54,-183.73 177.17,-196.85 ; 431.5,-39.37 531.5,-39.37 ; 492.13,-52.49 531.5,-39.37 ; 492.13,-26.25 531.5,-39.37 ; 527.48,-196.85 177.17,-196.85 ; 527.48,2618.11 157.48,2618.11 ; 527.48,2755.91 0,2755.91 ; 530.76,2854.33 -98.43,2854.33 ; 531.5,-43.31 531.5,-35.43 ; 1043.31,-43.31 1043.31,-35.43 ; 1044.04,2854.33 1673.23,2854.33 ; 1047.32,-196.85 1397.64,-196.85 ; 1047.32,2618.11 1417.32,2618.11 ; 1047.32,2755.91 1574.8,2755.91 ; 1082.68,-52.49 1043.31,-39.37 ; 1082.68,-26.25 1043.31,-39.37 ; 1143.31,-39.37 1043.31,-39.37 ; 1358.27,-209.97 1397.64,-196.85 ; 1358.27,-183.73 1397.64,-196.85 ; 1377.95,2604.99 1417.32,2618.11 ; 1377.95,2631.23 1417.32,2618.11 ; 1397.64,-200.79 1397.64,-192.91 ; 1417.32,2614.17 1417.32,2622.05 ; 1535.43,2742.78 1574.8,2755.91 ; 1535.43,2769.03 1574.8,2755.91 ; 1574.8,2751.97 1574.8,2759.84 ; 1633.86,2841.21 1673.23,2854.33 ; 1633.86,2867.45 1673.23,2854.33 ; 1673.23,2850.39 1673.23,2858.27 ; 1751.97,59.06 1771.65,0 ; 1751.97,2500 1771.65,2559.06 ; 1767.72,0 1775.59,0 ; 1767.72,2559.06 1775.59,2559.06 ; 1771.65,891.7 1771.65,0 ; 1771.65,1667.36 1771.65,2559.06 ; 1791.34,59.06 1771.65,0 ; 1791.34,2500 1771.65,2559.06 ; 1850.39,-39.37 1870.08,-98.43 ; 1850.39,2598.43 1870.08,2657.48 ; 1866.14,-98.43 1874.02,-98.43 ; 1866.14,2657.48 1874.02,2657.48 ; 1870.08,891.7 1870.08,-98.43 ; 1870.08,1667.36 1870.08,2657.48 ; 1889.76,-39.37 1870.08,-98.43 ; 1889.76,2598.43 1870.08,2657.48
  lines w10: 245,1820 300,1775 ; 525,675 600,625 ; 960,605 970,570 ; 1040,605 1055,570 ; 1090,315 1130,190 ; 1160,455 1225,450
  text "1771.654 (mil)" at 540.76,2830.72 h39.37
  text "1574.803 (mil)" at 537.48,2732.29 h39.37
  text "1259.843 (mil)" at 537.48,2594.49 h39.37
  text "787.402 (mil)" at -271.66,1439.71 h39.37 r90
  text "2559.055 (mil)" at 1805.11,901.7 h59.06 r90
  text "2755.906 (mil)" at 1903.53,901.7 h59.06 r90
  text "1889.764 (mil)" at -173.23,872.13 h39.37 r90
  text "511.811 (mil)" at 567,-133.83 h39.37
  text "1220.472 (mil)" at 537.48,-220.47 h39.37
Bottom Overlay:
  lines w1: -334.65,2066.93 1397.64,2066.93 ; -216.54,177.17 1397.64,177.17 ; 177.17,-216.54 177.17,2224.41 ; 1397.64,-216.54 1397.64,2224.41
  text "LIN" at 595,2165 h60
  text "BAT-" at 875,2165 h60
  text "BAT+" at 1145,2165 h60
  text "LIN_DIY" at 1055,1470 h100
  text "Ver: 1.02" at 850,1335 h60
  text "RXD" at 255,860 h40
  text "VDD33" at 315,800 h40
  text "SWDIO" at 305,745 h40
  text "SWCLK/TXD" at 475,690 h40
  text "nRST" at 285,635 h40
  text "GND" at 255,585 h40
  text "DM" at 680,355 h60
  text "+5V" at 1060,345 h60
  text "DP" at 670,265 h60
  text "GND" at 1060,265 h60